# Altium PCB TagConnectProgrammer.PcbDoc
Units mm, origin at the board's own origin, x right, y up, seen from the top; angles counter-clockwise.
Board outline 30 x 26 mm, 4 copper layers (Top Layer, VCC, GND, Bottom Layer), stack 0.603 mm thick; 19 components, 19 nets, 81 pads, 33 vias.
Unrouted connection lines stored in the file: 49.
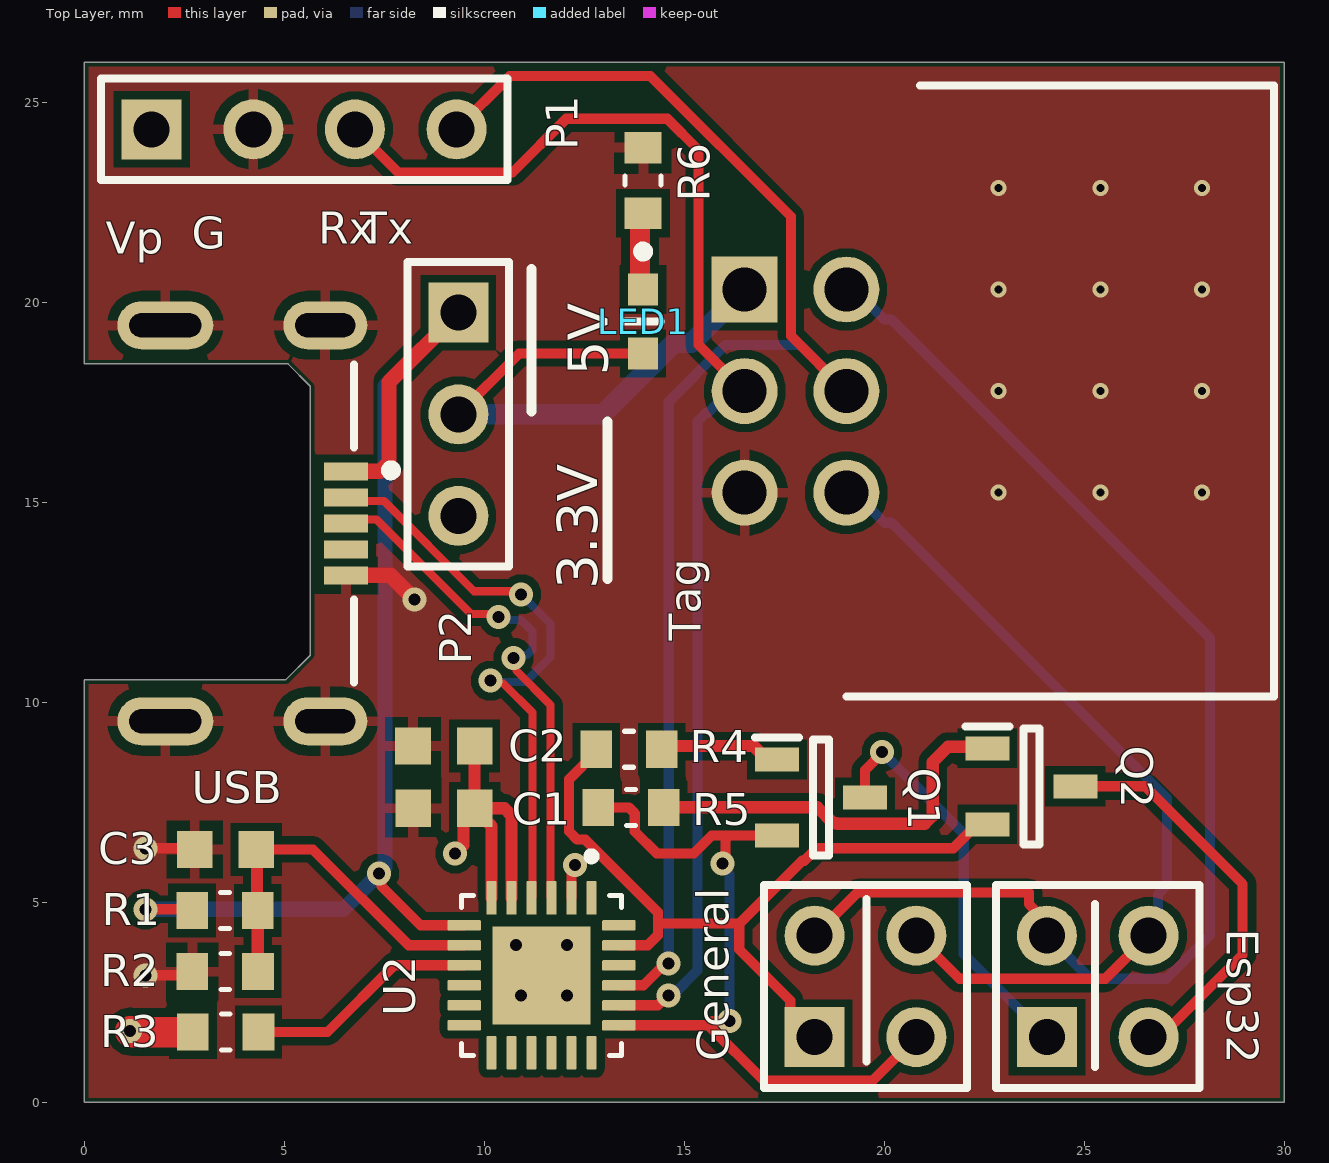
[diagram p0: Top Layer view]
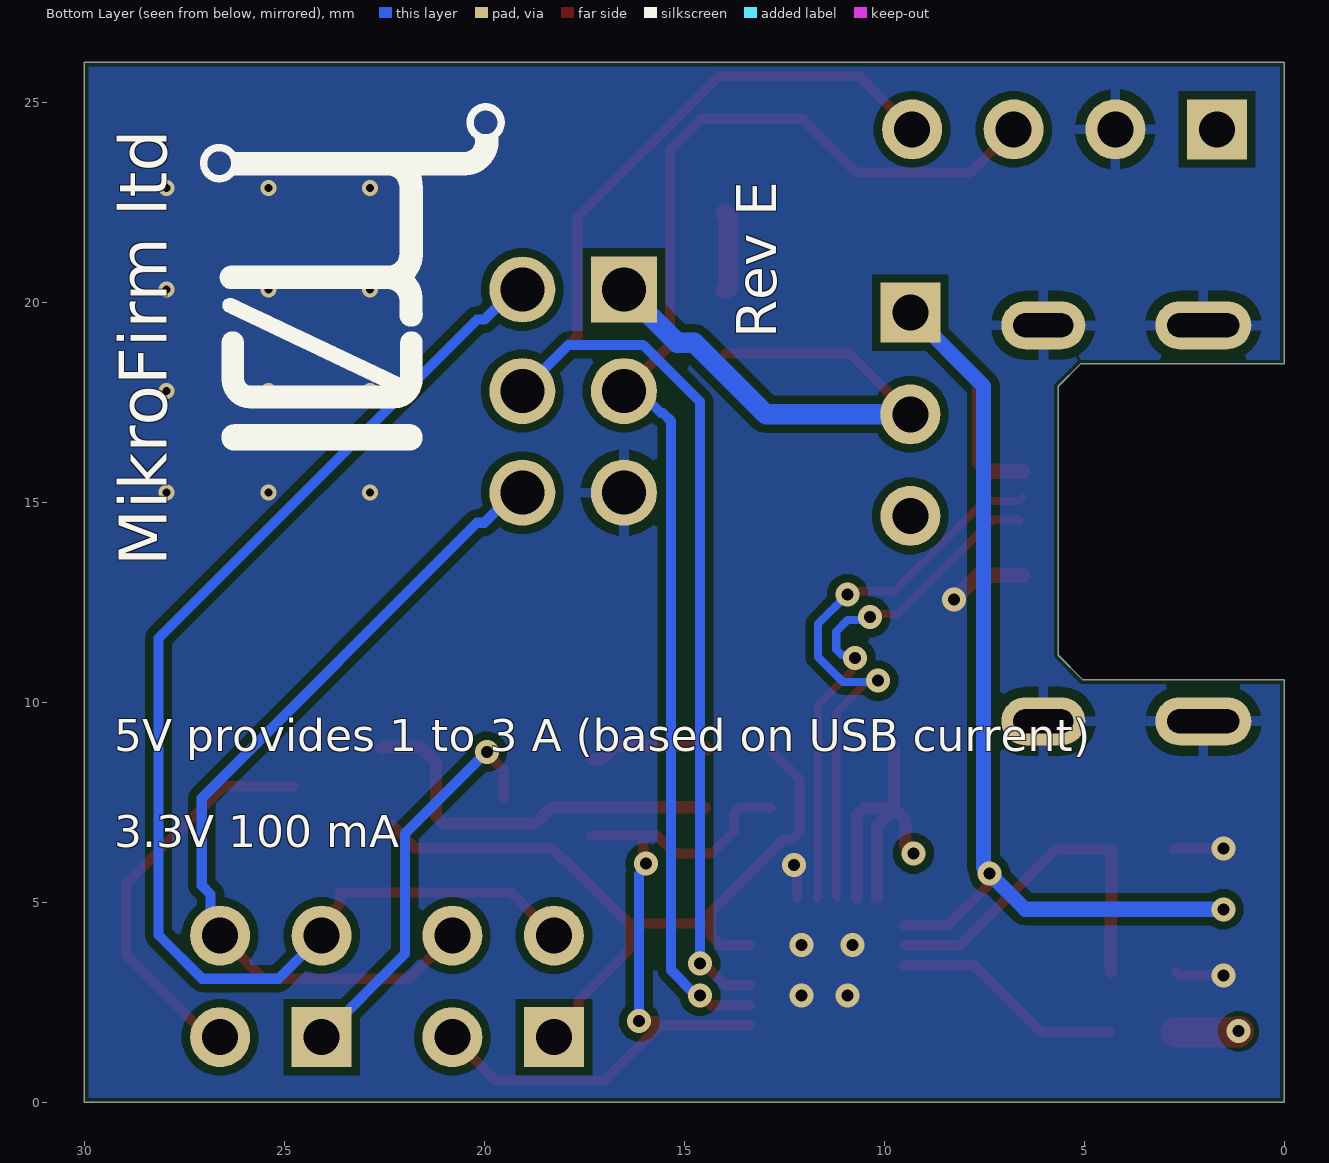
[diagram p1: Bottom Layer view, seen from below]
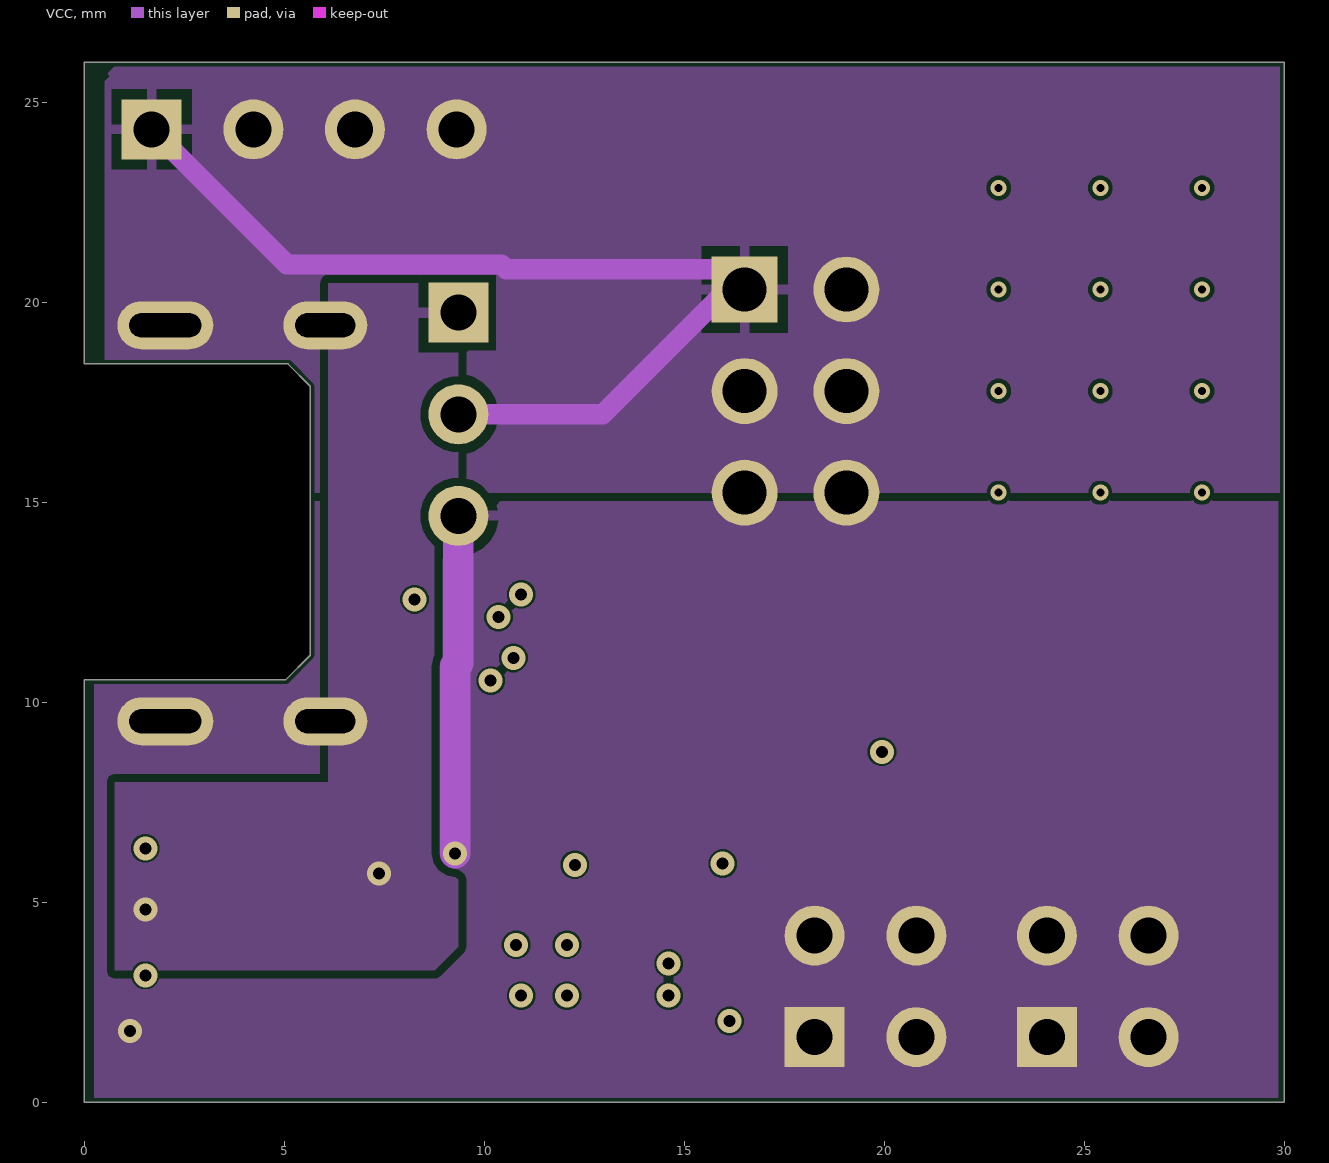
[diagram p2: VCC]
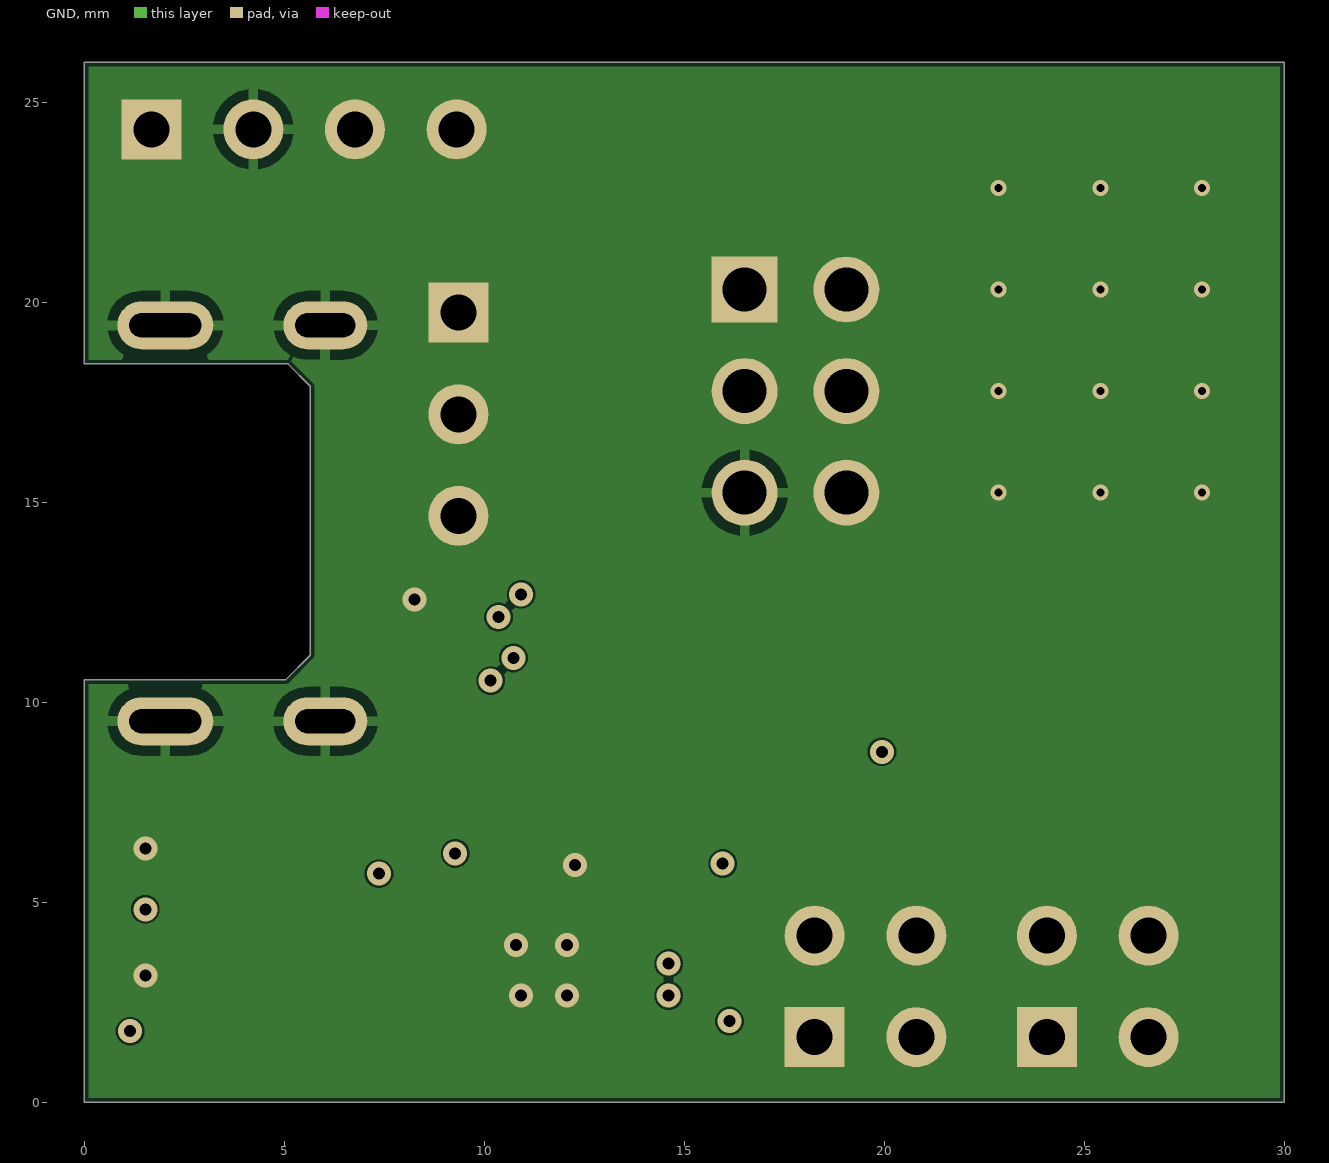
[diagram p3: GND]
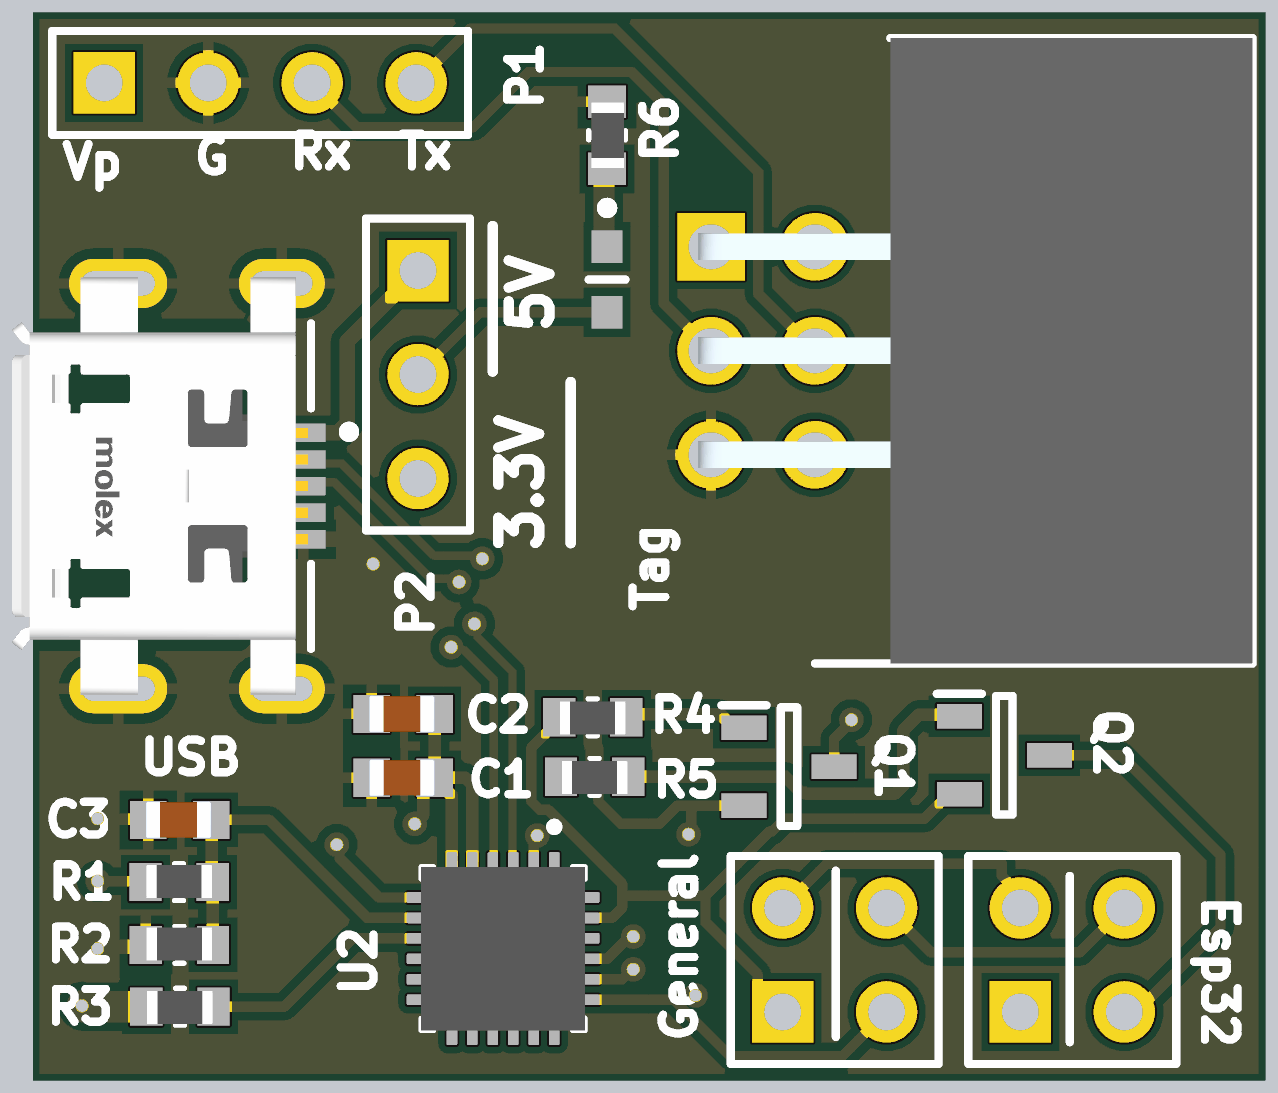
[diagram p4: 3D render of the assembled board from above, using the file's embedded part models]

## Layer stack, top to bottom
Top Solder: solder mask 0.0102, Solder Resist, Dk 3.5
Top Layer: signal copper 0.0356
Dielectric 2: prepreg 0.0711, PP-006, Dk 4.1
VCC: signal copper 0.035
Dielectric 1: dielectric 0.32, FR-4, Dk 4.8
GND: signal copper 0.035
Dielectric 3: prepreg 0.0711, PP-006, Dk 4.1
Bottom Layer: signal copper 0.0356
Bottom Solder: solder mask 0.0102, Solder Resist, Dk 3.5

## Board outline
0,0 0,10.558 5.033,10.558 5.65,11.175 5.65,17.9 5.092,18.458 0,18.458 0,26 30,26 30,0

## Design rules (kind name [scope] priority, off if disabled: settings)
BoardOutlineClearance [All] p1: gap=0.102 ignorepadtopadclearanceinfootprint=FALSE
Clearance [All] p1: gap=0.203 ignorepadtopadclearanceinfootprint=FALSE except(0.152: SMDPad-SMDPad)
DiffPairsRouting [All] p1: maxlimit=0.254 minlimit=0.254 mostfreqgap=0.254 toplayer_minwidth=0.203 toplayer_maxwidth=0.381 toplayer_prefwidth=0.381 midlayer1_minwidth=0.203 midlayer1_maxwidth=0.381 midlayer1_prefwidth=0.381 midlayer2_minwidth=0.203 midlayer2_maxwidth=0.381 midlayer2_prefwidth=0.381 bottomlayer_minwidth=0.203 bottomlayer_maxwidth=0.381 bottomlayer_prefwidth=0.381 maxuncoupledlength=12.7
MinimumSolderMaskSliver [All] p1: minsoldermaskwidth=0.051
PolygonConnect PolygonConnect_via [IsVia] p1: connectstyle=Direct reliefconductorwidth=0.254 reliefentries=4 polygonreliefangle="90 Angle" airgapwidth=0.254
PolygonConnect [All] p2: connectstyle=Relief reliefconductorwidth=0.254 reliefentries=4 polygonreliefangle="90 Angle" airgapwidth=0.254
RoomDefinition TagConnectProgrammer [InComponentClass('TagConnectProgrammer')] p1: confinementstyle=ConfineIn formatcopy=TRUE lockcomponents=FALSE outline -1.016,0 30.353,0 30.353,26.035 -1.016,26.035
RoutingVias [All] p1: holewidth=0.3 width=0.6 viastyle="Through Hole" minholewidth=0.2 minwidth=0.4 maxholewidth=3 maxwidth=6
SilkToSilkClearance [All] p1: silktosilkclearance=0.152
SilkToSolderMaskClearance [IsPad] p1: minsilkscreentomaskgap=0.102 clearancetoexposedcopper=TRUE
SolderMaskExpansion SolderMaskExpansion_via [IsVia] p1: expansion=0.102 istentingtop=TRUE
SolderMaskExpansion [All] p2: expansion=0.051 istentingtop=FALSE
Width [All] p1: maxlimit=1.016 minlimit=0.254 preferedwidth=0.381
26 further rules are at their usual default settings.

## Classes and differential pairs
differential pair D: +D_P -D_N

## Components (designator, comment, footprint, x,y, rotation, side; value= is the part's Value field where it differs from the comment)
C1 "100n" 0603C 8.218,7.35 r0 top
C2 "4.7uF" 0603C 8.216,8.909 r0 top
C3 "1uF" 0603C 2.761,6.322 r0 top
Esp32 "Header 2X2" HDR2X2 24.065,1.629 r0 top
General "Header 2X2" HDR2X2 18.259,1.629 r0 top
LED1 "150060VS55040" Würth_Elektronik_0_MFG 13.97,20.32 r270 top
P1 "Header 4" HDR1X4 1.685,24.325 r0 top
P2 "Header 3" HDR1X3 9.35,19.74 r270 top
Q1 "SS8050-G" SOT95P240X115-3N 18.415,7.62 r0 top
Q2 "SS8050-G" SOT95P240X115-3N 23.675,7.9 r0 top
R1 "22k1" 0603R 2.693,4.799 r0 top
R2 "47k5" 0603R 2.703,3.268 r0 top
R3 "10k" 0603R 4.356,1.757 r180 top
R4 "10k" 0603R 14.439,8.827 r180 top
R5 "10k" 0603R 14.484,7.374 r180 top
R6 "220R" 0603R 13.97,23.865 r270 top
Tag "Header 3X2H BOX" SHDRRA6W64P254X254_2X3_1528X885X910P 16.51,20.32 r270 top
U2 "CP2102N-A02-GQFN24R" QFN50P400X400X80-25N 11.43,3.175 r270 top
USB "USB -Debug" MOLEX_47642-0001 3.11,14.475 r270 top locked

## Footprints (in the part's own frame and the unit in brackets; to place one, negate y for a bottom-side part, rotate by r counter-clockwise, add the part's x,y. Pads: shape width x height; smd on the part's side, far side on the other; paste and mask are expansions set on the pad)
0603C [mm]
  rect 0.89x0.93 smd: 1(0,0) 2(1.54,0)
  body extent -0.06,-0.45 1.54,0.45, height 0.78
0603R [mm]
  rect 0.79x0.93 smd: 1(0,0) 2(1.64,0)
  silkscreen extent 0.71,-0.45 0.93,0.45, body extent 0.02,-0.38 1.62,0.42, height 0.55
HDR1X3 [mm] "Connector; Header; 3 Position"
  rect 1.5x1.5 hole 0.9: 1(0,0)
  round 1.5 hole 0.9: 2(2.54,0) 3(5.08,0)
  silkscreen extent -1.27,-1.27 6.35,1.27
HDR1X4 [mm] "Connector; Header; 4 Position"
  rect 1.5x1.5 hole 0.9: 1(0,0)
  round 1.5 hole 0.9: 2(2.54,0) 3(5.08,0) 4(7.62,0)
  silkscreen extent -1.27,-1.27 8.89,1.27
HDR2X2 [mm] "Connector; Header; 2x2 Position"
  rect 1.5x1.5 hole 0.9: 1(0,0)
  round 1.5 hole 0.9: 2(0,2.54) 3(2.54,0) 4(2.54,2.54)
  silkscreen extent -1.27,-1.27 3.81,3.81
MOLEX_47642-0001 [mm]
  rect 0.45x1.1 smd paste+0 mask+0: 1(-1.3,3.435) 2(-0.65,3.435) 3(0,3.435) 4(0.65,3.435) 5(1.3,3.435)
  rrect100% 1.2x2.1 hole 1.5 slot 0.6 at 0 deg paste-1000 mask+0: S1(-4.95,2.915) S4(4.95,2.915)
  rrect100% 1.2x2.4 hole 1.8 slot 0.6 at 0 deg paste-1000 mask+0: S2(-4.95,-1.085) S3(4.95,-1.085)
  silkscreen extent -3.98,3.63 3.98,4.68, body extent -5.65,-3.73 5.65,4.09, height 0.25
QFN50P400X400X80-25N [mm]
  rect 2.45x2.45 smd paste-2: 0(0,0)
  rrect25% 0.84x0.26 smd: 1(-1.935,1.25) 2(-1.935,0.75) 3(-1.935,0.25) 4(-1.935,-0.25) 5(-1.935,-0.75) 6(-1.935,-1.25) 13(1.935,-1.25) 14(1.935,-0.75) 15(1.935,-0.25) 16(1.935,0.25) 17(1.935,0.75) 18(1.935,1.25)
  rrect25% 0.26x0.84 smd: 7(-1.25,-1.935) 8(-0.75,-1.935) 9(-0.25,-1.935) 10(0.25,-1.935) 11(0.75,-1.935) 12(1.25,-1.935) 19(1.25,1.935) 20(0.75,1.935) 21(0.25,1.935) 22(-0.25,1.935) 23(-0.75,1.935) 24(-1.25,1.935)
  silkscreen extent -3.07,-2 2,2, body extent -2,-2 2,2, height 0.8
SHDRRA6W64P254X254_2X3_1528X885X910P [mm]
  rect 1.65x1.65 hole 1.1: 1(0,0)
  round 1.65 hole 1.1: 2(0,2.54) 3(2.54,0) 4(2.54,2.54) 5(5.08,0) 6(5.08,2.54)
  silkscreen extent -5.1,2.54 10.18,13.23, body extent -5.1,-0.32 10.18,13.23, height 9.1
SOT95P240X115-3N [mm]
  rect 1.1x0.6 smd: 1(-1.1,0.95) 2(-1.1,-0.95) 3(1.1,0)
  silkscreen extent -1.65,-1.45 0.2,1.5
Würth_Elektronik_0_MFG [mm]
  rect 0.8x0.75 smd paste+0 mask+0: 1(0,0) 2(1.6,0)
  silkscreen extent -1.07,-0.45 0.8,0.45, body extent -0.5,-0.55 2.1,0.55, height 0.25

## Part data
C1: "Multilayer Ceramic Capacitors MLCC - SMD/SMT 16V 0.1uF X7R 0603 10%", Manufacturer 1=KEMET, MPn1=C0603C104K4RACTU, Mouser Pn1=80-C0603C104K4R
C2: "Multilayer Ceramic Capacitors MLCC - SMD/SMT 4.7uF+/-10% 10V X5R 1608", Manufacturer 1="Samsung Electro-Mechanics", MPn1=CL10A475KP8NNNC, Mouser Pn1=187-CL10A475KP8NNNC
C3: "Multilayer Ceramic Capacitors MLCC - SMD/SMT 1uF+/-10% 10V X5R 1608", Manufacturer 1="Samsung Electro-Mechanics", MPn1=CL10A105KP8NNWC, Mouser Pn1=187-CL10A105KP8NNWC
Esp32 General: "Header, 2-Pin, Dual row", LatestRevisionDate=17-Jul-2002, LatestRevisionNote="Re-released for DXP Platform.", Publisher="Altium Limited"
LED1: library part "LED R", "Standard LEDs - SMD SMD 0603 RED", Manufacturer 1=Dialight, MPn1=599-0010-007F, Mouser Pn1=645-599-0010-007F
P1: "Header, 4-Pin", LatestRevisionDate=17-Jul-2002, LatestRevisionNote="Re-released for DXP Platform.", Publisher="Altium Limited"
P2: "Header, 3-Pin", LatestRevisionDate=17-Jul-2002, LatestRevisionNote="Re-released for DXP Platform.", Publisher="Altium Limited"
Q1 Q2: "NPN TRANSISTOR 1.5A 40V SOT-23 R", Manufacturer 1="Comchip Technology", Digikey Pn1=641-1790-1-ND, Mouser Pn1=750-SS8050-G, MPn1=SS8050-G
R1: "Thick Film Resistors - SMD 0603 22Kohms 1% AEC-Q200", Manufacturer 1=Panasonic, MPn1=ERJ-3EKF2212V, Mouser Pn1=667-ERJ-3EKF2212V
R2: "Thin Film Resistors - SMD 1/8W 47.5K ohm 1% 50ppm", Manufacturer 1=YAGEO, MPn1=RT0603BRD0747K5L, Mouser Pn1=603-RT0603BRD0747K5L
R3 R4 R5: "Thick Film Resistors - SMD 0603 10Kohms 1% AEC-Q200", Manufacturer 1=Panasonic, MPn1=ERJ-3EKF1002V, Mouser Pn1=667-ERJ-3EKF1002V
R6: "Thick Film Resistors - SMD 220 Ohms 100-200 mW 0603 1%", Manufacturer 1=YAGEO, MPn1=RC0603FR-13220RL, Mouser Pn1=603-RC0603FR-13220RL
Tag: "Headers & Wire Housings WR-BHD 2.54mm Male 6P Angl Gold BoX Hdr", Manufacturer_Name="Wurth Elektronik", Manufacturer_Part_Number=61200621721, Mouser Part Number=710-61200621721, Datasheet Link=http://uk.rs-online.com/web/p/products/8236468, Height=9.1mm, Mouser Price/Stock=https://www.mouser.co.uk/ProductDetail/Wurth-Elektronik/61200621721?qs=PhR8RmCirEbh0%2F%252BOR%252BGA%252BA%3D%3D
U2: library part CP2102N-A02-GQFN20R, "IC USB TO UART BRIDGE QFN24", Manufacturer 1="Silicon Labs", MPn1=CP2102N-A02-GQFN24, Digikey Pn1=336-5888-1-ND, Mouser Pn1=634-CP2102NA02QFN24
USB: library part "USB - micro B", "USB - micro B Receptacle Connector 5 Position Board Edge, Cutout; Surface Mount, Right Angle", Manufacturer 1=Molex, MPn1=47642-0001, Mouser Pn1=538-47642-0001

## Via types
v1: diameter 0.6, hole 0.3, Top Layer to Bottom Layer, tented both sides, 21 vias
v2: diameter 0.4, hole 0.2, Top Layer to Bottom Layer, tented both sides, 12 vias

## Nets (pads, with @x,y where several pads share a name; then routed paths per layer and width w, separated by ;. In a path a pad name is that pad's centre, name@x,y a point inside that pad or via, vN(x,y) a via of type N, cw(c..) or ccw(c..) an arc to the next point about the centre after c; other vN are vias at no path point)
3V3-MCU: C1.2 C2.2 P2.3 R3.2 U2.5 U2.6 | length 18.4
  Top Layer w0.305: v1(9.271,6.223) 9.476,6.428 9.476,7.068 C1.2@9.757,7.349 ; C2.2 C2.2 C1.2@9.757,7.349 ; U2.6 10.18,6.909 9.757,7.332 C1.2@9.757,7.349 ; U2.5 10.68,7.172 10.501,7.35 C1.2 C1.2@9.757,7.349
  Top Layer w0.762: v1(1.143,1.778) 1.164,1.757 R3.2
  VCC w0.762: v1(9.271,6.223) 9.271,10.902 9.35,10.981 P2.3
D_N: U2.4 USB.2 | length 14.7
  Top Layer w0.203: USB.2 6.641,15.029 7.49,15.029 9.742,12.776 10.846,12.776 v1(10.922,12.7) ; 10.481,10.465 11.201,9.744 11.201,5.131 U2.4
  Bottom Layer w0.203: v1(10.16,10.541) 10.197,10.504 11.03,10.504 11.659,11.133 11.659,11.963 v1(10.922,12.7)
D_P: U2.3 USB.3 | length 12.8
  Top Layer w0.203: USB.3@6.628,14.544 6.655,14.571 7.3,14.571 9.664,12.208 10.278,12.208 v1(10.354,12.132) ; 10.804,10.788 11.659,9.934 11.659,5.131 U2.3
  Bottom Layer w0.203: v1(10.354,12.132) 10.43,12.056 10.919,12.056 11.202,11.774 11.202,11.322 11.064,11.185 10.804,11.185 v1(10.728,11.109)
DTR: General.1 Q2.2 R4.2 U2.23 | length 19.9
  Top Layer w0.254: R4.2 12.799,8.757 12.119,8.077 12.119,6.772 12.323,6.568 12.524,6.568 14.338,4.754 14.338,4.466 ; U2.23 13.368,3.928 14.088,3.928 14.338,4.178 14.338,4.466 ; General.1 17.646,2.242 17.646,2.547 16.374,3.819 16.374,4.466 ; Q2.2 22.325,6.95 21.725,6.35 18.312,6.35 18.002,6.04 17.948,6.04 16.374,4.466 ; 14.338,4.466 16.374,4.466
EN_Auto: Esp32.1 Q1.3 | length 10.2
  Top Layer w0.254: Q1.3 19.515,8.301 19.939,8.725 v1(19.939,8.763)
  Bottom Layer w0.254: v1(19.939,8.763) 21.985,6.717 21.985,3.709 Esp32.1
GND: C1.1 C2.1 C3.1 P1.2 R2.1 R6.1 Tag.5 U2.0 U2.2 USB.5 USB.S1 USB.S2 USB.S3 USB.S4 | length 5.3
  Top Layer w0.254: v1(1.524,3.175) 2.61,3.175 R2.1 ; v1(1.524,6.35) 2.733,6.35 C3.1 ; U2.2 12.183,5.113 12.183,5.764 12.263,5.844 v1(12.263,5.938)
  Top Layer w0.381: USB.5 7.653,13.175 v1(8.255,12.573)
  other v1: 10.922,2.667 12.065,2.667 10.795,3.937 12.065,3.937
  other v2: 22.86,15.24 25.4,15.24 27.94,15.24 22.86,17.78 25.4,17.78 27.94,17.78 22.86,20.32 25.4,20.32 27.94,20.32 22.86,22.86 25.4,22.86 27.94,22.86
IO0_Auto: Esp32.3 Q2.3 | length 10.2
  Top Layer w0.254: Q2.3 26.517,7.9 28.956,5.461 28.956,3.691 26.894,1.629 Esp32.3
NetEsp32_2: Esp32.2 General.2 Tag.2 | length 32.2
  Top Layer w0.254: General.2 19.339,5.249 23.616,5.249 23.616,4.955 24.065,4.506 Esp32.2
  Bottom Layer w0.254: Tag.2 19.25,20.32 20.003,19.567 20.183,19.567 28.145,11.605 28.145,4.181 27.053,3.089 25.145,3.089 Esp32.2
NetEsp32_4: Esp32.4 General.4 Tag.6 | length 21.5
  Top Layer w0.254: General.4 21.879,3.089 25.525,3.089 Esp32.4
  Bottom Layer w0.254: Tag.6 19.25,15.24 20.003,14.487 20.183,14.487 27.065,7.605 27.065,5.427 26.844,5.205 26.844,4.407 Esp32.4
NetLED1_1: LED1.1 R6.2 | length 2
  Top Layer w0.508: LED1.1 13.894,20.396 13.894,22.149 R6.2
NetQ1_1: Q1.1 R4.1 | length 3
  Top Layer w0.305: R4.1 14.518,8.906 16.729,8.906 17.065,8.57 Q1.1
NetQ2_1: Q2.1 R5.1 | length 9.9
  Top Layer w0.305: R5.1 14.495,7.363 14.538,7.363 14.552,7.377 18.323,7.377 18.714,6.985 18.797,6.985 18.818,6.964 21.01,6.964 21.209,7.164 21.209,8.509 21.59,8.89 22.535,8.89 Q2.1
NetR3_1: R3.1 U2.9 | length 5.8
  Top Layer w0.254: R3.1 6.08,1.757 7.749,3.425 U2.9
RTS: General.3 Q1.2 R5.2 U2.19 | length 19.2
  Top Layer w0.254: R5.2 13.61,7.374 13.759,7.225 13.759,6.772 14.308,6.223 15.24,6.223 15.687,6.67 16.129,6.67 ; U2.19 15.601,1.925 ; v1(15.96,5.969) 16.026,6.035 16.026,6.567 16.129,6.67 ; v1(16.129,2.032) 16.123,2.026 15.702,2.026 15.601,1.925 ; Q1.2 16.129,6.67 ; General.3 19.719,0.549 16.977,0.549 15.601,1.925
  Bottom Layer w0.254: v1@15.936,5.969 15.936,5.9 16.129,5.706 v1(16.129,2.032)
RX: P1.3 Tag.3 U2.20 | length 34
  Top Layer w0.254: P1.3 7.845,23.245 10.704,23.245 12.05,24.59 14.572,24.59 15.355,23.807 15.355,18.935 Tag.3 ; U2.20 14.339,2.425 14.581,2.667 v1(14.61,2.667)
  Bottom Layer w0.254: v1(14.61,2.667) 14.698,2.667 15.33,3.299 15.33,17.03 15.532,17.232 15.584,17.232 16.132,17.78 Tag.3
TX: P1.4 Tag.4 U2.21 | length 36.3
  Top Layer w0.254: P1.4@9.306,24.325 10.635,25.654 14.155,25.654 17.665,22.144 17.665,19.165 Tag.4 ; U2.21 13.368,2.928 13.98,2.928 14.481,3.429 14.569,3.429 v1(14.61,3.47)
  Bottom Layer w0.254: v1(14.61,3.47) 14.61,17.513 16.032,18.935 17.895,18.935 Tag.4
V-Prog: LED1.2 P1.1 P2.2 Tag.1 | length 38.5
  Top Layer w0.254: P2.2 10.87,18.72 LED1.2
  VCC w0.508: P1.1 5.063,20.947 10.429,20.947 10.548,20.828 16.002,20.828 Tag.1@16.295,20.535 ; P2.2 12.96,17.2 Tag.1@16.295,20.535 ; Tag.1 Tag.1@16.295,20.535
  Bottom Layer w0.508: P2.2 12.96,17.2 14.752,18.992 15.182,18.992 Tag.1
V_usb: C3.2 R1.2 R2.2 U2.8 | length 9.3
  Top Layer w0.254: C3.2 5.714,6.322 8.11,3.925 U2.8
  Top Layer w0.305: C3.2 4.317,6.305 4.317,4.815 R1.2 4.338,4.794 4.338,3.272 R2.2
VBUS: P2.1 R1.1 U2.7 USB.1 | length 30.7
  Top Layer w0.254: v1(1.524,4.826) 2.666,4.826 R1.1 ; v1(7.366,5.715) 7.432,5.649 7.432,5.397 8.255,4.574 8.404,4.425 U2.7
  Top Layer w0.381: USB.1 7.397,15.775 7.62,15.998 7.62,18.01 P2.1
  Bottom Layer w0.381: v1(1.524,4.826) 6.477,4.826 v1(7.366,5.715) 7.519,5.868 7.519,17.909 P2.1
pads on no net: U2.1 U2.10 U2.11 U2.12 U2.13 U2.14 U2.15 U2.16 U2.17 U2.18 U2.22 U2.24 USB.4

## Polygon pours and split planes (outlines as drawn)
3V3-MCU on VCC "3V3-MCU_L02_P003" (solid, pour order 3): 0.254,25.781 0.254,-0.127 29.845,-0.127 29.972,0 29.845,0.127 29.845,26.035 0.508,26.035 0.381,25.908
V-Prog on VCC "V-PROG_L02_P002" (solid, pour order 2): 0.635,25.654 0.508,25.527 0.508,15.24 25.1,15.24 30,15.24 30,25.908 0.762,25.908 0.381,25.527
VBUS on VCC "VBUS_L02_P001" (solid, pour order 1): 6.096,20.574 9.35,20.574 9.35,3.889 8.763,3.302 0.762,3.302 0.762,8.001 6.096,8.001
GND on GND "GND_L03_P000" (solid, pour order 0): -0.254,26.67 -0.381,26.543 -0.381,-1.397 30.734,-1.397 31.496,-0.635 31.496,26.797 -0.635,26.797 -0.762,26.67
GND on Bottom Layer "GND_L04_P004" (solid, pour order 4): -0.762,27.305 -0.762,-1.905 30.861,-1.905 33.401,0.635 33.401,27.686 -0.381,27.686 -0.635,27.432
GND on Top Layer "GND_L01_P005" (solid, remove dead copper, pour order 5): -0.381,26.162 -0.127,25.908 -0.127,-2.286 28.702,-2.286 30.988,0 30.607,0.381 30.607,27.686 1.143,27.686 -0.254,26.289

## Silkscreen, mask and mechanical layers (free items; w line width, h text height)
Top Overlay:
  lines w0.2: 19.558,1.016 19.558,5.08 ; 25.273,0.889 25.273,4.953
  lines w0.254: 11.176,17.272 11.176,20.828 ; 13.081,13.081 13.081,17.018
  text "Rx" at 5.852,21.463 h0.8
  text "Tx" at 6.892,21.463 h0.8
  text "G" at 2.685,21.336 h0.8
  text "Vp" at 0.531,21.209 h0.8
  text "5V" at 13.081,18.161 h1 r90
  text "3.3V" at 12.827,12.827 h1 r90
Bottom Overlay:
  drawing of 3 lines, arcs and shapes, not listed
  text "Rev E" at 12.7,19.107 h1 r270
  text "MikroFirm ltd" at 27.94,13.396 h1.2 r270
  text "5V provides 1 to 3 A (based on USB current) /  / 3.3V 100 mA" at 29.256,6.372 h0.8
Board Shape:
  the board outline again, w0.1